# Altium PCB Voltage detect zip.PcbDoc
Units mm, origin at the board's own origin, x right, y up, seen from the top; angles counter-clockwise.
Board outline 104.6 x 37 mm, 2 copper layers (Top Layer, Bottom Layer); 26 components, 23 nets, 68 pads, 11 vias.
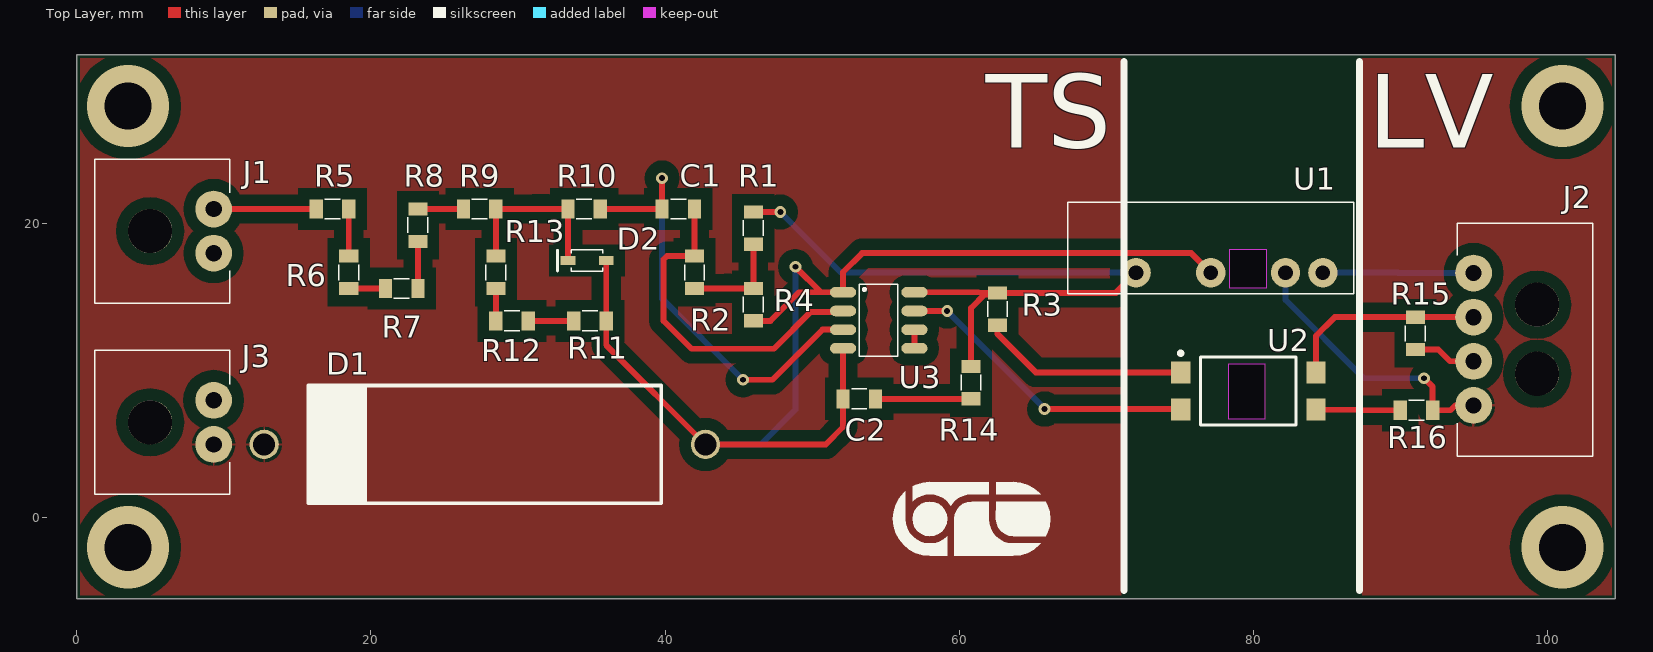
[diagram p0: Top Layer view]
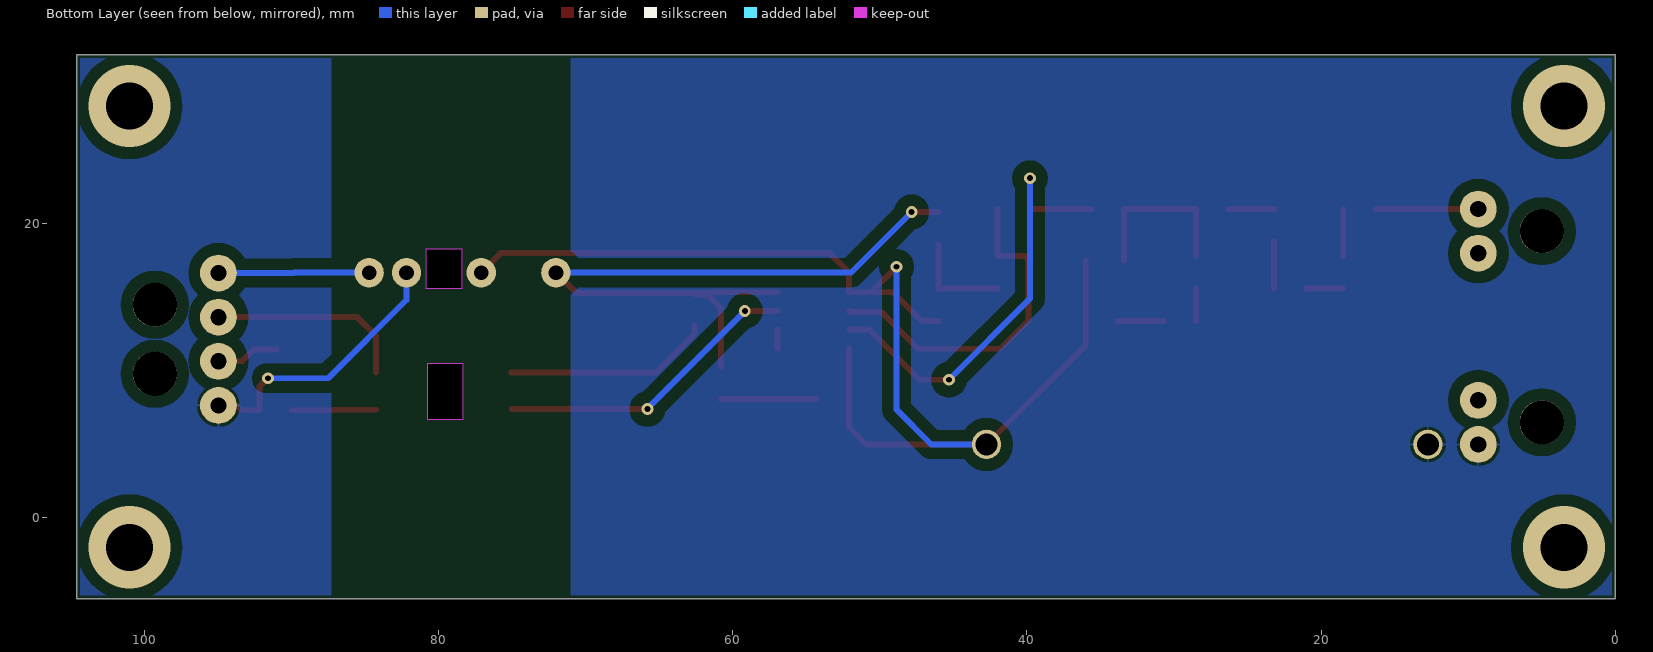
[diagram p1: Bottom Layer view, seen from below]

## Layer stack, top to bottom
Top Solder: solder mask 0.0102, Solder Resist, Dk 3.5
Top Layer: signal copper 0.0356
Dielectric 1: dielectric 0.32, FR-4, Dk 4.8
Bottom Layer: signal copper 0.0356
Bottom Solder: solder mask 0.0102, Solder Resist, Dk 3.5

## Board outline
0,-5.5 0,31.5 104.6,31.5 104.6,-5.5
cut-out: 78.3,10.5 80.775,10.5 80.775,6.7 78.3,6.7
cut-out: 78.388,18.25 80.863,18.25 80.863,15.6 78.388,15.6

## Design rules (kind name [scope] priority, off if disabled: settings)
AcuteAngle [All] p1: minimum=3.50000000000000E+0001 checktracksonly=FALSE
BoardOutlineClearance "BoardOutlineClearance 1" [All] p1: gap=0.25 ignorepadtopadclearanceinfootprint=FALSE except(0: Arc-SplitContinuation Track-SplitContinuation SMDPad-SplitContinuation THPad-SplitContinuation Via-SplitContinuation Fill-SplitContinuation Poly-SplitContinuation Region-SplitContinuation Text-SplitContinuation) // Milling
Clearance "Clearance-1 1/2 Oz" [All] p1: gap=0.125 ignorepadtopadclearanceinfootprint=FALSE except(0.2: Arc-Fill Track-Fill SMDPad-SMDPad SMDPad-Fill THPad-Fill Via-Fill Fill-Fill Fill-Poly Poly-Poly Poly-Region Poly-Text; 0.25: Arc-Hole Track-Hole SMDPad-Hole THPad-Hole Via-Hole Fill-Hole Poly-Hole Region-Hole Text-Hole; 0.8: Arc-Poly Track-Poly SMDPad-Poly THPad-Poly Via-Poly) // Standart
ComponentClearance [All] p1: gap=0.1 collisioncheckmode=3 verticalgap=0.1 showdistances=FALSE
DiffPairsRouting "DiffPairsRouting 1/2 Oz" [All] p1: maxlimit=0.254 minlimit=0.125 mostfreqgap=0.254 toplayer_minwidth=0.125 toplayer_maxwidth=0.381 toplayer_prefwidth=0.381 bottomlayer_minwidth=0.125 bottomlayer_maxwidth=0.381 bottomlayer_prefwidth=0.381 maxuncoupledlength=12.7
HoleSize "Minimum HoleSize" [IsPad] p1: absolutevalues=TRUE maxlimit=5.9 minlimit=0.6 maxpercent=80.000 minpercent=20.000
HoleSize "Minimum HoleSize VIA 1" [IsVia] p2: absolutevalues=TRUE maxlimit=5.9 minlimit=0.3 maxpercent=80.000 minpercent=20.000 // Standart
HoleToHoleClearance Hole2HoleClearance [All] p1: gap=0.25 allowstackedmicrovias=FALSE
MinimumAnnularRing "Minimum AR VIA Standart" [All] p1: minimumring=0.15
MinimumAnnularRing "Minimum AR PAD Standart" [All] p2: minimumring=0.2
MinimumSolderMaskSliver "SolderMask Bridge Standart" [All] p1: minsoldermaskwidth=0.15 // All Masks
PlaneClearance "PlaneClearance-1 1/2 Oz" [All] p1: clearance=0.2 // Standart
PlaneConnect "TermalConnect-1 1/2 Oz" [All] p1: planeconnectstyle=Relief reliefexpansion=0.2 reliefentries=4 reliefconductorwidth=0.2 reliefairgap=0.2 // Standart
PolygonConnect "PolygonConnect-1 1/2 Oz" [All] p1: thpad.connectstyle=Relief thpad.reliefconductorwidth=0.15 thpad.reliefentries=4 thpad.polygonreliefangle="90 Angle" thpad.airgapwidth=0.2 smdpad.connectstyle=Relief smdpad.reliefconductorwidth=0.2 smdpad.reliefentries=4 smdpad.polygonreliefangle="90 Angle" smdpad.airgapwidth=0.2 via.connectstyle=Direct via.reliefconductorwidth=0.254 via.reliefentries=4 via.polygonreliefangle="90 Angle" via.airgapwidth=0.254 // Standart
RoutingCorners [All] p1 off: cornerstyle=45-Degree minsetback=2.54 maxsetback=2.54
RoutingVias [All] p1: holewidth=0.4 width=0.8 viastyle="Through Hole" minholewidth=0.3 minwidth=0.6 maxholewidth=5.9 maxwidth=8.9
SilkToSilkClearance Silk2SilkClearance [All] p1 off: silktosilkclearance=0.15
SilkToSolderMaskClearance Silk2SolderMaskClearance [IsPad] p1 off: minsilkscreentomaskgap=0.15 clearancetoexposedcopper=TRUE
SolderMaskExpansion SolderMaskExpansion-1 [All] p1: expansion=0.05 istentingtop=FALSE // Standart
UnRoutedNet [All] p1: checkbadconnections=TRUE
Width "Width 1/2 Oz" [All] p1: maxlimit=10 minlimit=0.125 preferedwidth=0.4 minimp=50.000000 maximp=50.000000 favimp=50.000000 checkconnectedcopper=TRUE
19 further rules are at their usual default settings.

## Classes and differential pairs
component class "Voltage detect": J1 J2 J3 R16 U2

## Components (designator, comment, footprint, x,y, rotation, side; value= is the part's Value field where it differs from the comment)
C1 "10nF" "0805 Capicator" 40.9,21 r0 top
C2 "0.1uF" "0805 Capicator" 53.2,8.1 r180 top
D1 "Diode" BY12 28.385,4.746 r180 top
D2 "Zener 12V" sod-323 36,17.5 r180 top
J1 "Conn2x1" "MolexMicroFit 2x1" 9.32,21 r270 top
J2 "Conn4x1" "MolexMicroFit 4x1" 94.955,16.65 r90 top
J3 "Conn2x1" "MolexMicroFit 2x1" 9.32,8 r270 top
R1 "75K" "0805 Resistor" 46,19.7 r270 top
R2 "100R" "0805 Resistor" 42,16.7 r90 top
R3 "100R" "0805 Resistor" 62.6,14.2 r90 top
R4 "24K" "0805 Resistor" 46,14.5 r90 top
R5 "200K" "0805 Resistor" 17.4,21 r0 top
R6 "200K" "0805 Resistor" 18.5,16.7 r270 top
R7 "200K" "0805 Resistor" 22.1,15.6 r0 top
R8 "200K" "0805 Resistor" 23.2,19.9 r90 top
R9 "200K" "0805 Resistor" 27.4,21 r0 top
R10 "100R" "0805 Resistor" 34.5,21 r0 top
R11 "2k4" "0805 Resistor" 34.9,13.4 r180 top
R12 "24K" "0805 Resistor" 29.6,13.4 r0 top
R13 "24K" "0805 Resistor" 28.5,16.7 r90 top
R14 "1k" "0805 Resistor" 60.8,9.2 r270 top
R15 "1k" "0805 Resistor" 91,12.55 r270 top
R16 "1k" "0805 Resistor" 91.075,7.325 r0 top
U1 "DC/DC" SIP7 75.825,17.945 r270 top
U2 "Opt" FAIR-MDIP-4_V 79.65,8.63 r0 top
U3 "Comparator" SO-8 52.1,15.34 r0 top

## Footprints (in the part's own frame and the unit in brackets; to place one, negate y for a bottom-side part, rotate by r counter-clockwise, add the part's x,y. Pads: shape width x height; smd on the part's side, far side on the other; paste and mask are expansions set on the pad)
"0805 Capicator" [mm]
  rect 0.9x1.3 smd: 1(-1.1,0) 2(1.1,0)
  silkscreen extent -0.52,-0.67 0.53,0.68, body extent -1.05,-0.67 1.05,0.68, height 0.75
"0805 Resistor" [mm]
  rect 0.9x1.3 smd: 1(-1.1,0) 2(1.1,0)
  silkscreen extent -0.53,-0.68 0.52,0.67, body extent -1.05,-0.67 1.05,0.68, height 0.6
BY12 [mm]
  round 2 hole 1.5: 1(-14.365,-0.254) 2(15.635,-0.254)
  silkscreen extent -11.36,-4.25 12.63,3.75
FAIR-MDIP-4_V [mm]
  rect 1.3x1.5 smd: 1(-4.6,1.27) 2(-4.6,-1.27) 3(4.6,-1.27) 4(4.6,1.27)
  silkscreen extent -4.72,-2.3 3.25,2.69, body extent -5.08,-2.3 5.08,2.3, height 3.85
"MolexMicroFit 2x1" [mm]
  round 2.5 hole 1.1: 1(3,0) 2(0,0)
  round 3 hole 3: A(1.5,-4.32)
  silkscreen extent -3.4,-8.1 6.4,1.1, body extent -3.33,-8.9 6.33,1, height 5.64
"MolexMicroFit 4x1" [mm]
  round 2.5 hole 1.1: 1(0,0) 2(-3,0) 3(-6,0) 4(-9,0)
  round 3 hole 3: A(-6.85,-4.32) A(-2.15,-4.32)
  silkscreen extent -12.45,-8.1 3.4,1.1, body extent -12.35,-8.87 3.3,1.03, height 5.64
SIP7 [mm]
  round 2 hole 1: 1(1.27,8.89) 2(1.27,6.35) 4(1.27,1.27) 6(1.27,-3.81)
  silkscreen extent -3.51,-8.46 2.72,10.99, body extent -3.43,-8.38 2.66,10.92, height 10.16
SO-8 [mm]
  oval 1.78x0.72 smd: 1(0,0) 2(0,-1.27) 3(0,-2.54) 4(0,-3.81) 5(4.85,-3.81) 6(4.85,-2.54) 7(4.85,-1.27) 8(4.85,0)
  silkscreen extent 1.1,-4.35 3.73,0.55, body extent -0.45,-4.35 5.33,0.55, height 1.45
sod-323 [mm]
  rect 1x0.6 smd: 1(0,0) 2(2.6,0)
  silkscreen extent 0.22,-0.73 3.3,0.72, body extent 0.03,-0.68 2.63,0.67, height 1.1

## Part data
C1: library part "Cap 10nF (0805)", "0805 X7R 10nF 100V 10%", Manufacturer="Murata Manufacturing", Part Number=GRM21BR72A103KA01L, ComponentLink1Description=Chip&Dip, ComponentLink1URL=https://www.chipdip.ru/product/grm21br72a103ka01l, Type=Capacitor
C2: library part "Cap 0.1uF (0805)", "0.1uF X7R 50V 10% 0805", Manufacturer="Murata Manufacturing", Part Number=GRM21BR71H104K, ComponentLink1Description=Chip&Dip, ComponentLink1URL=https://www.chipdip.ru/product/grm21br71h104k, Type=Capacitor
D1: library part BY12, "BY12 - Highg voltage diode", ComponentLink1Description=ChipDip, ComponentLink1URL=https://www.chipdip.ru/product/by12, ComponentLink2Description=Datasheet, ComponentLink2URL=https://static.chipdip.ru/lib/508/DOC001508556.pdf
D2: library part "Zener Diode 12V", "300mW", Manufacturer="NXP Semiconductor", Part Number=BZX384-C12,115, ComponentLink1Description=Chip&Dip, ComponentLink1URL=https://www.chipdip.ru/product/bzx384-c12.115, ComponentLink2Description=DataSheet, ComponentLink2URL=https://static.chipdip.ru/lib/583/DOC001583013.pdf, Type=Diode
J1 J3: library part "Conn2x1 [MicroFit]", "Micro-Fit 3.0 Right-Angle Header, 3.00mm Pitch, Single Row, 2 Circuits, with Snap-in Plastic Peg PCB Lock, Tin, Glow-Wire Capable, Black", Manufacturer=Molex, Part Number=436500200, ComponentLink1Description=Molex, ComponentLink1URL=https://www.molex.com/molex/products/part-detail/pcb_headers/0436500200, Type=Connector
J2: library part "Conn4x1 [MicroFit]", "Micro-Fit 3.0 Right-Angle Header, 3.00mm Pitch, Single Row, 4 Circuits, with Snap-in Plastic Peg PCB Lock, Tin, Glow-Wire Capable, Black", Manufacturer=Molex, Part Number=436500400, ComponentLink1Description=Molex, ComponentLink1URL=https://www.molex.com/molex/products/part-detail/pcb_headers/0436500400, Type=Connector
R1: library part "Res 75K (0805)", "0.125W 0805 75K, 1%", Manufacturer=Taiwan, Part Number=RC0805FR-0775KL, ComponentLink1Description=Chip&Dip, ComponentLink1URL=https://www.chipdip.ru/product0/9000079535, Type=Resistor
R2 R3 R10: library part "Res 100R (0805)", "0.125W 0805 100R, 1%", Manufacturer=Taiwan, Part Number=RC0805FR-07100RL, ComponentLink1Description=Chip&Dip, ComponentLink1URL=https://www.chipdip.ru/product0/9000079462, Type=Resistor
R4 R12 R13: library part "Res 24K (0805)", "0.125W 0805 24K, 1%", Manufacturer=Taiwan, Part Number=RC0805FR-0724KL, ComponentLink1Description=Chip&Dip, ComponentLink1URL=https://www.chipdip.ru/product0/9000079523, Type=Resistor
R5 R6 R7 R8 R9: library part "Res 200K (0805)", "0.125W 0805 200K, 1%", Manufacturer=Taiwan, Part Number=RC0805FK-07200KL, ComponentLink1Description=Chip&Dip, ComponentLink1URL=https://www.chipdip.ru/product0/914213016, Type=Resistor
R11: library part "Res 2.4k (0805)", "0.125W 0805 2.4k, 1%", Manufacturer=Taiwan, Part Number=RC0805FR-072K4L, ComponentLink1Description=Chip&Dip, ComponentLink1URL=https://www.chipdip.ru/product0/9000079495, Type=Resistor
R14 R15 R16: library part "Res 1k (0805)", "0.125W 0805 1k, 1%", Manufacturer=Taiwan, Part Number=RC0805FR-071KL, ComponentLink1Description=Chip&Dip, ComponentLink1URL=https://www.chipdip.ru/product0/9000079486, Type=Resistor
U1: library part "DC/DC Isolated [TMH]", "The TMH series are ultra miniature, isolated 2 Watt DC/DC-converters in a Single-in-Line  package  (SIP)", ComponentLink1Description=Chip&Dip, ComponentLink1URL=https://www.chipdip.ru/product/tmh-1205s, ComponentLink2Description="New link", ComponentLink2URL=https://static.chipdip.ru/lib/005/DOC001005854.pdf
U2: library part "Optocoupler [FOD817B]", "Phototransistor Optocoupler, 4 us Rise, 3 us Fall, 5000 Vrms, -55 to 110 degC, 4-Pin MDIP, RoHS, Tape and Reel", Manufacturer="ON Semiconductor", Part Nomber=FOD817B, ComponentLink1Description=CHIPDIP, ComponentLink1URL=https://www.chipdip.ru/product/fod817b, ComponentLink2Description=Datasheet, ComponentLink2URL=https://static.chipdip.ru/lib/297/DOC000297284.pdf
U3: library part "Comparator [LM3]", "Differential comparator with strobes", Manufacturer="Texas Instruments", Part Number=LM311DR, ComponentLink1Description=DataSheet, ComponentLink1URL=https://static.chipdip.ru/lib/222/DOC000222396.pdf, ComponentLink2Description=Chip&Dip, ComponentLink2URL=https://www.chipdip.ru/product/lm311d, Type=IC

## Via types
v1: diameter 0.8, hole 0.4, Top Layer to Bottom Layer, 7 vias
v2: diameter 5.6, hole 3.2, Top Layer to Bottom Layer, 4 vias

## Nets (pads, with @x,y where several pads share a name; then routed paths per layer and width w, separated by ;. In a path a pad name is that pad's centre, name@x,y a point inside that pad or via, vN(x,y) a via of type N, cw(c..) or ccw(c..) an arc to the next point about the centre after c; other vN are vias at no path point)
"5V IN": J2.3 R15.2 | length 4.3
  Top Layer w0.4: R15.2 92.556,11.45 93.356,10.65 J2.3
12V: R1.1 R3.2 R14.1 U1.6 U3.8 | length 49.6
  Top Layer w0.4: R1.1 v1(47.837,20.8) ; U3.8 61.314,15.34 R3.2 ; R14.1 60.8,14.266 61.734,15.2 62.5,15.2 R3.2 ; U1.6 70.64,15.3 R3.2
  Bottom Layer w0.4: v1(47.837,20.8) 51.962,16.675 U1.6
"DC/DC GND": J2.4 R16.2 U1.2 | length 18.9
  Top Layer w0.4: v1(91.592,9.5) 92.175,8.917 R16.2 93.394,7.325 93.719,7.65 J2.4
  Bottom Layer w0.4: U1.2 82.175,14.825 87.5,9.5 89.35,9.5 v1(91.592,9.5) v1@91.7,9.5
"DC/DC IN": J2.1 U1.1 | length 10.3
  Bottom Layer w0.4: U1.1 89.813,16.675 89.838,16.65 J2.1
GND: C2.2 D1.1 D2.1 R4.1 R11.1 U1.4 U3.1 U3.4 | length 84.1
  Top Layer w0.4: D2.1 R11.1 36,11.75 D1.1 50.92,5 52.1,6.18 C2.2 52.1,9.812 U3.4 ; R4.1 47.166,13.4 49.106,15.34 50.595,15.34 ; v1(48.858,17.077) 50.595,15.34 ; U1.4 75.77,18 53.4,18 52.1,16.7 U3.1 50.595,15.34
  Bottom Layer w0.4: D1.1 46.5,5 48.858,7.358 v1(48.858,17.077)
HV+: J1.2 R5.1 | length 7
  Top Layer w0.4: J1.2 R5.1
HV-: D1.2 J3.1
NetC1_1: C1.1 R10.2 U3.3 | length 30.5
  Top Layer w0.4: R10.2 C1.1 v1(39.8,23.1) ; v1(45.3,9.4) 47.3,9.4 50.7,12.8 U3.3
  Bottom Layer w0.4: v1(39.8,23.1) 39.8,14.9 v1(45.3,9.4)
NetC1_2: C1.2 R2.2 U3.2 | length 23.6
  Top Layer w0.4: C1.2 R2.2 40.134,17.8 39.9,17.566 39.9,13.4 41.8,11.5 47.4,11.5 49.909,14.009 52.039,14.009 U3.2
NetC2_1: C2.1 R14.2 | length 6.5
  Top Layer w0.4: C2.1 R14.2
NetD2_2: D2.2 R9.2 R10.1 R13.2 | length 11.6
  Top Layer w0.4: R13.2 R9.2 30.935,21 R10.1 33.4,19.236 D2.2
NetR1_2: R1.2 R2.1 R4.2 | length 7
  Top Layer w0.4: R2.1 43.991,15.6 R4.2 R1.2
NetR3_1: R3.1 U2.1 | length 14.1
  Top Layer w0.4: R3.1 62.584,13.1 62.584,12.516 65.2,9.9 U2.1
NetR5_2: R5.2 R6.1 | length 3.2
  Top Layer w0.4: R6.1 18.5,19.388 R5.2
NetR6_2: R6.2 R7.1 | length 2.5
  Top Layer w0.4: R6.2 R7.1
NetR7_2: R7.2 R8.1 | length 3.2
  Top Layer w0.4: R7.2 R8.1
NetR8_2: R8.2 R9.1 | length 3.1
  Top Layer w0.4: R8.2 R9.1
NetR11_2: R11.2 R12.2 | length 3.1
  Top Layer w0.4: R12.2 R11.2
NetR12_1: R12.1 R13.1 | length 2.2
  Top Layer w0.4: R12.1 28.5,14.486 R13.1
NetR16_1: R16.1 U2.3 | length 5.7
  Top Layer w0.4: U2.3 87.095,7.36 87.13,7.325 R16.1
NetU2_2: U2.2 U3.7 | length 20.9
  Top Layer w0.254: U3.7 U3.7@56.952,14.072 ; v1@59.172,14.072 v1(59.175,14.075) ; U2.2@75.01,7.4 U2.2
  Top Layer w0.4: U3.7@56.952,14.072 v1@59.172,14.072 ; v1(65.8,7.4) U2.2@75.01,7.4
  Bottom Layer w0.254: v1@59.175,14.05 v1(59.175,14.075) ; v1(65.8,7.4) v1@65.8,7.425
  Bottom Layer w0.4: v1@59.175,14.05 v1@65.8,7.425
NetU3_5: U3.5 U3.6 | length 1.3
  Top Layer w0.4: U3.5 U3.6
Sgn: J2.2 R15.1 U2.4 | length 13.7
  Top Layer w0.4: U2.4 84.25,12.38 85.52,13.65 R15.1 92.962,13.65 J2.2
pads on no net: J1.1 J1.A J2.A J3.2 J3.A
copper on no net:
  other v2: 3.5,-2 101,-2 3.5,28 101,28

## Polygon pours and split planes (outlines as drawn)
"DC/DC GND" on Top Layer "NONET_L-01_P-001" (solid, pour order 3): 87.4,32.892 105.5,32.892 105.5,-7.408 87.4,-7.408
HV- on Top Layer "NONET_L-01_P-001" (solid, pour order 7): 0,-7.025 0,35.55 71,35.55 71,-7.025
"DC/DC GND" on Bottom Layer "NONET_L-01_P-001" (solid, pour order 6): 87.3,32.727 105.5,32.727 105.5,-7.473 87.3,-7.473
HV- on Bottom Layer "NONET_L-01_P-001" (solid, pour order 5): 0,-8.475 0,34.925 71,34.925 71,-8.475

## Silkscreen, mask and mechanical layers (free items; w line width, h text height)
Top Overlay:
  region: 56.339,-0.059 56.331,-0.059 56.363,-0.386 56.458,-0.7 56.613,-0.99 56.821,-1.243 57.075,-1.452 57.365,-1.606 57.679,-1.702 58.006,-1.734 58.332,-1.702 58.646,-1.606 58.936,-1.452 59.177,-1.254 59.172,-2.559 58.006,-2.559 58.006,-2.571 57.516,-2.523 57.044,-2.38 56.61,-2.148 56.229,-1.835 55.917,-1.455 55.685,-1.02 55.542,-0.549 55.493,-0.059 55.542,0.431 55.685,0.902 55.917,1.337 56.229,1.717 56.337,1.806
  region: 58.31,1.078 58.594,0.96 58.838,0.773 59.025,0.529 59.142,0.245 59.182,-0.059 59.142,-0.364 59.025,-0.647 58.838,-0.891 58.594,-1.078 58.31,-1.196 58.006,-1.236 57.701,-1.196 57.417,-1.078 57.174,-0.891 56.987,-0.647 56.869,-0.364 56.829,-0.059 56.869,0.245 56.987,0.529 57.174,0.773 57.417,0.96 57.701,1.078 58.006,1.118
  region: 64.162,2.405 64.634,2.262 65.068,2.03 65.449,1.717 65.537,1.609 62.506,1.608 62.506,2.441 63.672,2.441 63.672,2.453
  region: 65.993,0.902 66.136,0.431 66.184,-0.059 66.136,-0.549 65.993,-1.02 65.883,-1.226 63.672,-1.226 63.672,-1.236 63.368,-1.196 63.084,-1.078 62.84,-0.891 62.653,-0.647 62.536,-0.364 62.496,-0.059 62.506,1.108 65.883,1.108
  region: 62.006,2.441 62.006,1.608 60.839,1.608 60.839,1.616 60.512,1.583 60.198,1.488 59.908,1.333 59.655,1.125 59.446,0.871 59.422,0.826 59.398,0.871 59.19,1.125 58.936,1.333 58.646,1.488 58.332,1.583 58.006,1.616 57.679,1.583 57.365,1.488 57.075,1.333 56.834,1.136 56.839,2.152 57.044,2.262 57.516,2.405 58.006,2.453
  region: 62.006,1.108 62.006,-0.059 61.998,-0.059 62.03,-0.386 62.125,-0.7 62.28,-0.99 62.488,-1.243 62.742,-1.452 63.031,-1.606 63.346,-1.702 63.672,-1.734 65.536,-1.726 65.537,-1.727 65.449,-1.835 65.068,-2.148 64.634,-2.38 64.162,-2.523 63.672,-2.571 59.672,-2.559 59.672,-0.059 59.662,-0.059 59.702,0.245 59.82,0.529 60.007,0.773 60.251,0.96 60.534,1.078 60.839,1.118
  lines w0.5: 71.2,-4.9 71.2,31 ; 87.2,-4.9 87.2,31
  text "TS" at 61.8,25.175 h5
  text "LV" at 87.8,25.175 h5
Mechanical 1:
  the board outline again, w0.254
Mechanical 15:
  lines w0.254: 120.25,-40.5 127.75,-40.5